# Altium PCB BLE_TORQUE.PcbDoc
Units mm, origin at the board's own origin, x right, y up, seen from the top; angles counter-clockwise.
Board outline 29.97 x 29.97 mm, 2 copper layers (Top Layer, Bottom Layer); 16 components, 16 nets, 110 pads, 17 vias.
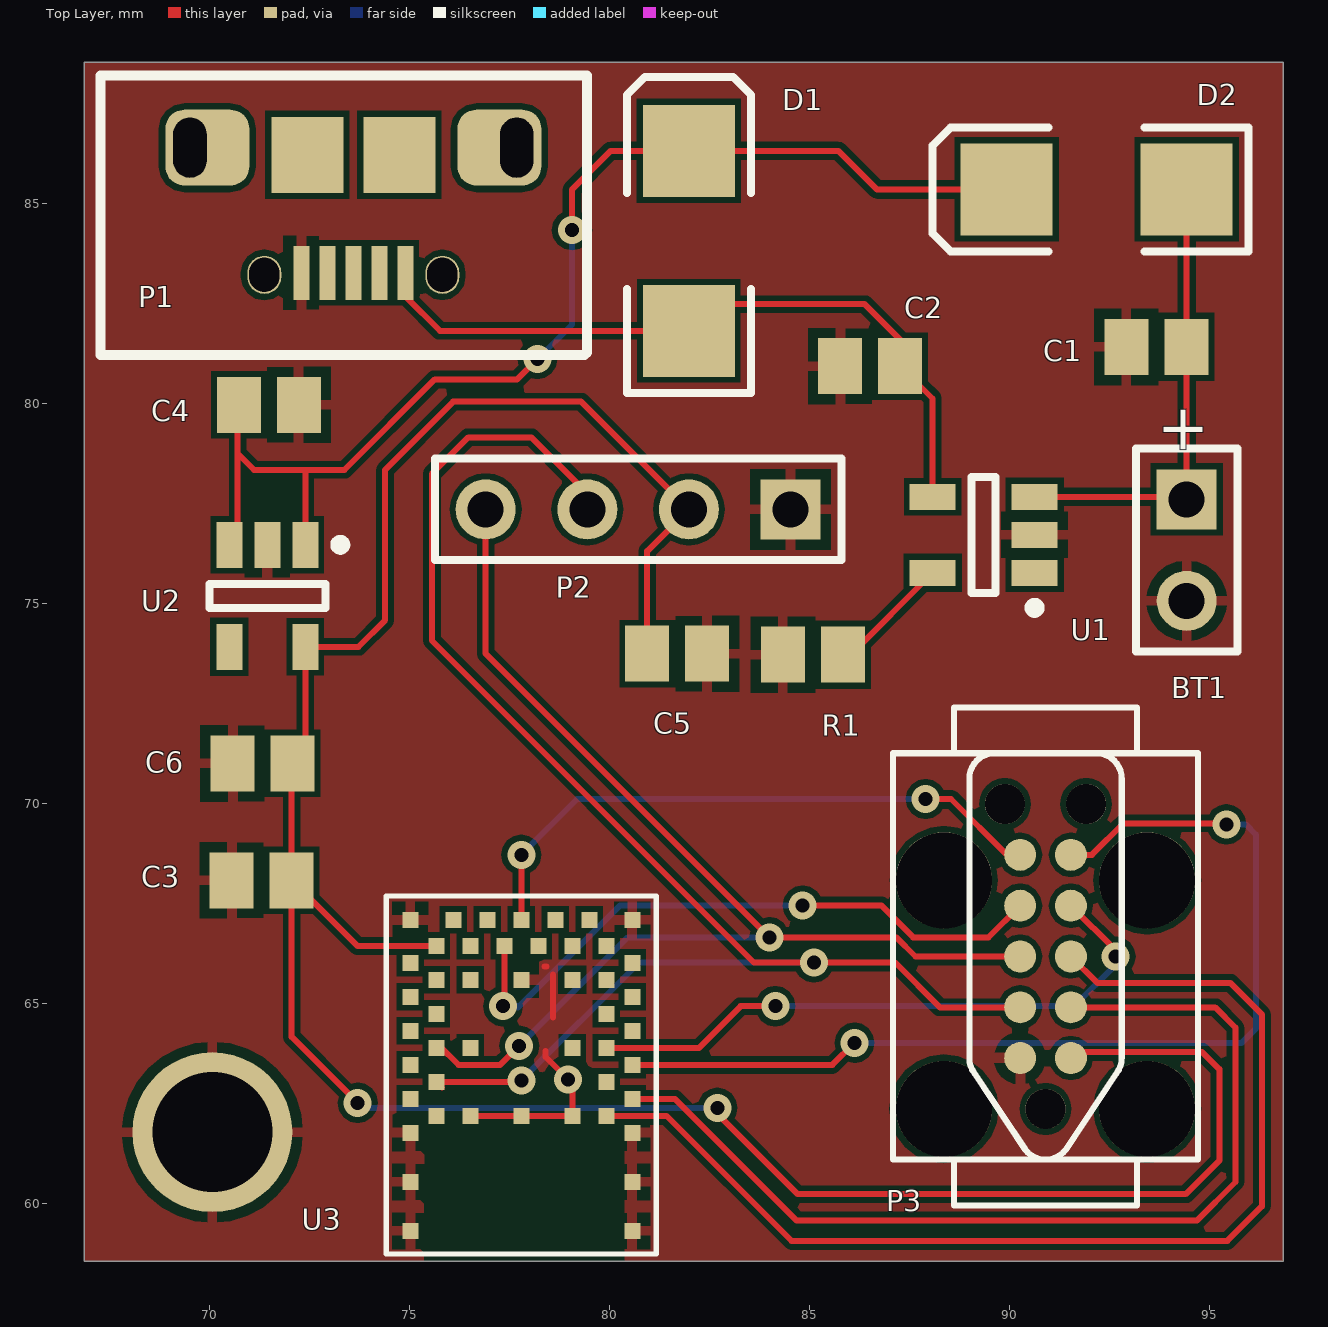
[diagram p0: Top Layer view]
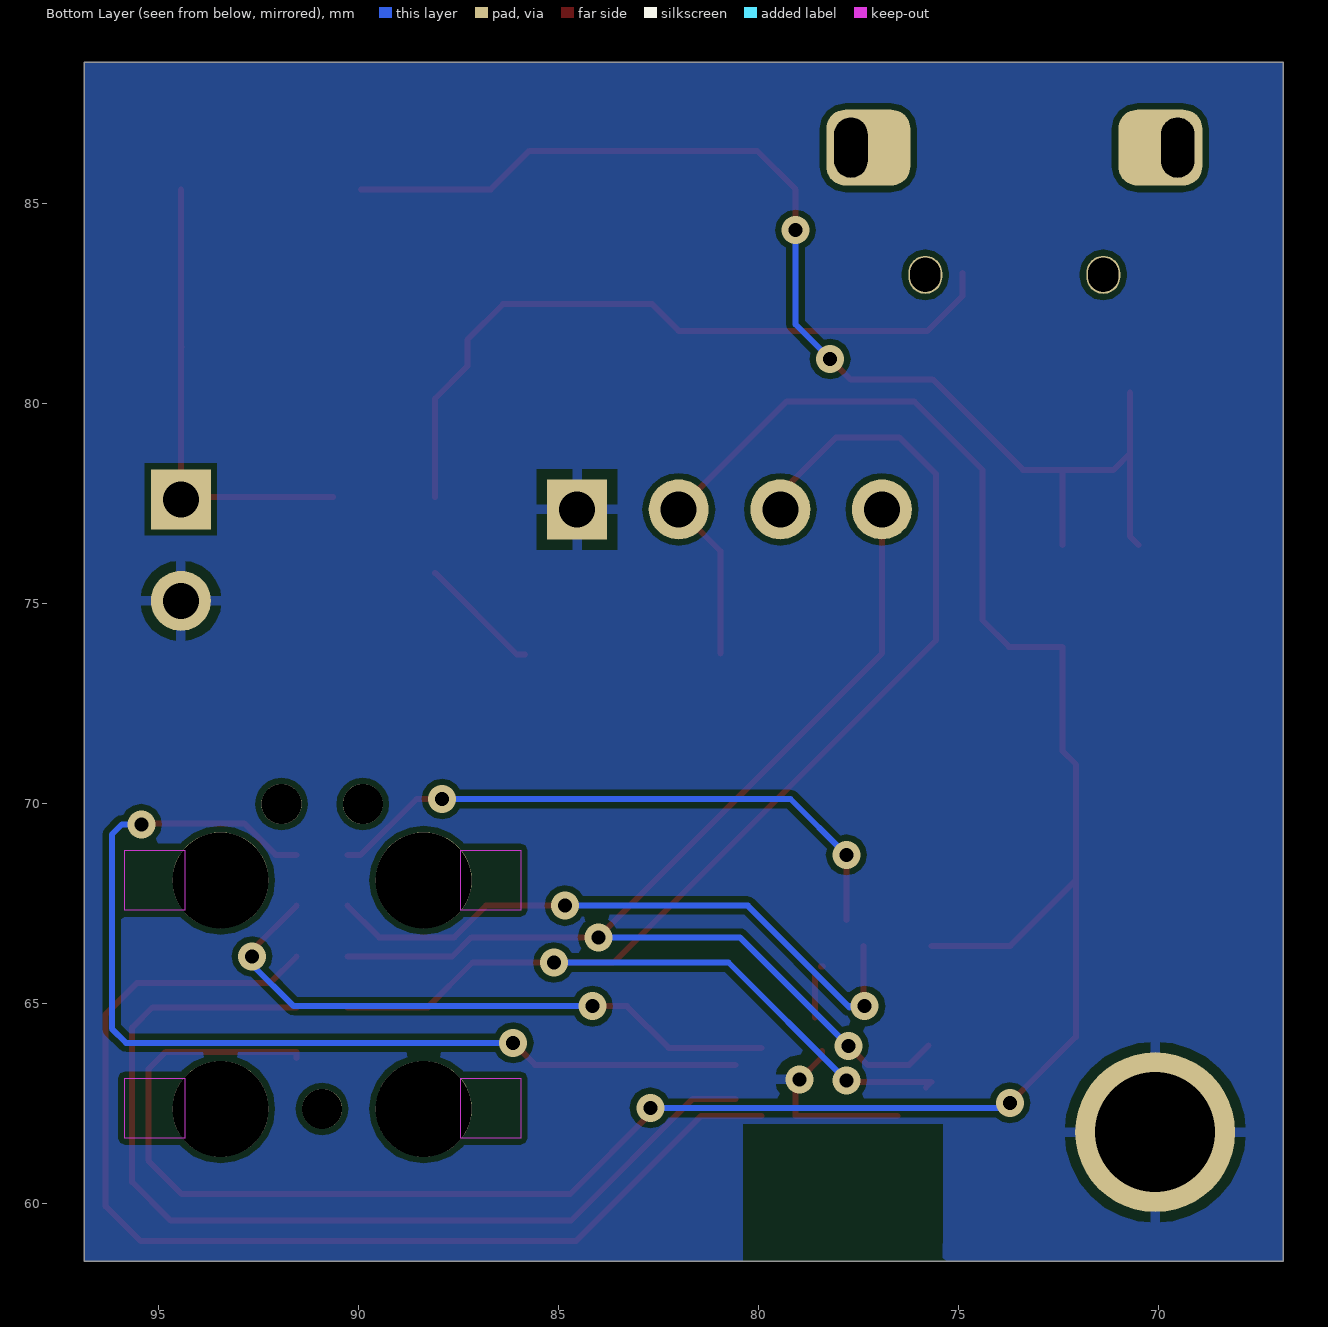
[diagram p1: Bottom Layer view, seen from below]

## Layer stack, top to bottom
Top Solder: solder mask 0.0102, Solder Resist, Dk 3.5
Top Layer: signal copper 0.0356
Dielectric 1: dielectric 0.32, FR-4, Dk 4.8
Bottom Layer: signal copper 0.0356
Bottom Solder: solder mask 0.0102, Solder Resist, Dk 3.5

## Board outline
66.878,58.547 96.85,58.547 96.85,88.519 66.878,88.519

## Design rules (kind name [scope] priority, off if disabled: settings)
Clearance [All] p1: gap=0.15 ignorepadtopadclearanceinfootprint=FALSE
DiffPairsRouting [All] p1: maxlimit=0.254 minlimit=0.15 mostfreqgap=0.15 toplayer_minwidth=0.15 toplayer_maxwidth=0.15 toplayer_prefwidth=0.15 bottomlayer_minwidth=0.15 bottomlayer_maxwidth=0.15 bottomlayer_prefwidth=0.15 maxuncoupledlength=12.7
HoleSize [All] p1: absolutevalues=TRUE maxlimit=2.54 minlimit=0.35 maxpercent=80.000 minpercent=20.000
HoleToHoleClearance [All] p1: gap=0.15 allowstackedmicrovias=TRUE
MinimumSolderMaskSliver [All] p1: minsoldermaskwidth=0.15
PolygonConnect [All] p1: connectstyle=Relief reliefconductorwidth=0.254 reliefentries=4 polygonreliefangle="90 Angle" airgapwidth=0.254
RoutingVias [All] p1: holewidth=0.35 width=0.7 viastyle="Through Hole" minholewidth=0.35 minwidth=0.7 maxholewidth=0.35 maxwidth=0.7
SilkToSilkClearance [All] p1: silktosilkclearance=0.15
SilkToSolderMaskClearance [IsPad] p1: minsilkscreentomaskgap=0.15 clearancetoexposedcopper=FALSE
SolderMaskExpansion [All] p1: expansion=0.102
Width [All] p1: maxlimit=0.15 minlimit=0.15 preferedwidth=0.15
24 further rules are at their usual default settings.

## Components (designator, comment, footprint, x,y, rotation, side; value= is the part's Value field where it differs from the comment)
BT1 "Battery" BAT-2 94.437,76.327 r270 top
C1 "Cap" C0805 93.675,81.407 r180 top value=4.7uF
C2 "Cap" C0805 86.524,80.924 r180 top value=4.7uF
C3 "Cap Pol3" C0805 71.311,68.072 r180 top value=10uF
C4 "Cap Pol3" C0805 71.488,79.959 r0 top value=10uF
C5 "Cap" C0805 81.698,73.736 r0 top value=0.1uF
C6 "Cap" C0805 71.335,70.993 r180 top value=4.7uF
D1 "Diode" SMB 81.991,84.059 r90 top
D2 "Diode" SMB 92.187,85.344 r180 top
P1 "MICRO_USB_AB" MICRO_USB_AB 75.827,83.208 r270 top
P2 "E2NS" HDR1X4 84.531,77.343 r180 top
P3 "TC2050-IDC" TC2050-IDC 91.542,63.627 r90 top
R1 "Res1" C0805 85.09,73.711 r180 top value=2K
U1 "MCP73831" SOT-23-5 89.357,76.708 r180 top
U2 "MIC5219" SOT-23-5 71.45,75.184 r270 top
U3 "BMD-350-A" BMD-350 77.8,63.881 r180 top

## Footprints (in the part's own frame and the unit in brackets; to place one, negate y for a bottom-side part, rotate by r counter-clockwise, add the part's x,y. Pads: shape width x height; smd on the part's side, far side on the other; paste and mask are expansions set on the pad)
BAT-2 [mm] "Battery; 2 Leads"
  rect 1.5x1.5 hole 0.9: 1(-1.27,0)
  round 1.5 hole 0.9: 2(1.27,0)
  silkscreen extent -2.54,-1.27 2.54,1.27
BMD-350 [mm] "BMD-350, LGA, 47pin ,0.8mm Pitch, 8.65mm x 6.4mm"
  rect 0.4x0.4 smd: 1(-2.775,4.575) 2(-2.775,3.35) 3(-2.775,2.125) 4(-2.125,1.7) 5(-2.775,1.275) 6(-2.125,0.85) 7(-2.775,0.425) 8(-2.125,0) 9(-2.775,-0.425) 10(-2.125,-0.85) 11(-2.775,-1.275) 12(-2.125,-1.7) 13(-2.775,-2.125) 14(-2.125,-2.55) 15(-2.775,-3.2) 16(-1.7,-3.2) 17(-1.275,-2.55) 18(-0.85,-3.2) 19(-0.425,-2.55) 20(0,-3.2) 21(0.425,-2.55) 22(0.85,-3.2) 23(1.275,-2.55) 24(1.7,-3.2) 25(2.125,-2.55) 26(2.775,-3.2) 27(2.775,-2.125) 28(2.125,-1.7) 29(2.775,-1.275) 30(2.125,-0.85) 31(2.775,-0.425) 32(2.125,0) 33(2.775,0.425) 34(2.125,0.85) 35(2.775,1.275) 36(2.125,1.7) 37(2.775,2.125) 38(2.775,3.35) 39(2.775,4.575) 40(-1.275,1.7) 41(-1.275,0) 42(-1.275,-1.7) 43(0,-1.7) 44(1.275,-1.7) 45(1.275,0) 46(1.275,1.7) 47(0,1.7)
  Multi-Layer pour cut-out: -2.575,4.9 -2.575,1.9 2.425,1.9 2.425,4.9
  silkscreen extent -3.37,-3.8 3.37,5.15, body extent -3.2,-3.62 3.2,5.03, height 1.47
C0805 [mm] "Chip Capacitor, Body 2.0x1.3mm, IPC High Density"
  rect 1.1x1.4 smd: 1(-0.75,0) 2(0.75,0)
  body extent -1.1,-0.72 1.1,0.72, height 1.4
HDR1X4 [mm] "Connector; Header; 4 Position"
  rect 1.5x1.5 hole 0.9: 1(0,0)
  round 1.5 hole 0.9: 2(2.54,0) 3(5.08,0) 4(7.62,0)
  silkscreen extent -1.27,-1.27 8.89,1.27
MICRO_USB_AB [mm] "Molex, Micro USB type AB 47589-0001"
  rect 1.35x0.4 smd: 1(-0.05,-0.925) 2(-0.05,-1.575) 3(-0.05,-2.225) 4(-0.05,-2.875) 5(-0.05,-3.525)
  rrect50% 1.9x2.1 hole 0.83 slot 1.5 at 0 deg unplated copper offset 0,-0.435: ""(-3.18,1.86)
  rrect50% 1.9x2.1 hole 0.83 slot 1.5 at 0 deg unplated copper offset 0,0.435: ""(-3.18,-6.31)
  rect 1.9x1.8 smd: ""(-3,-1.075) ""(-3,-3.375)
  oval 0.95x0.85 hole 0.75 slot 0.85 at 0 deg unplated: ""(0,0) ""(0,-4.45)
  silkscreen extent -4.98,-8.55 2.01,3.62
SMB [mm] "DO-214-AA/SMB; 2 C-Bend Leads; Body 5.3 x 3.6 mm, inc. leads (LxW)"
  rect 2.3x2.3 smd: 1(-2.25,0) 2(2.25,0)
  silkscreen extent -3.8,-1.55 4.1,1.55
SOT-23-5 [mm] "SOT23, 5-Leads, Body 2,9x2,8mm (max), Pitch 0,95mm, IPC Medium Density"
  rect 1.15x0.65 smd: 1(-1.275,0.95) 2(-1.275,0) 3(-1.275,-0.95) 4(1.275,-0.95) 5(1.275,0.95)
  silkscreen extent -1.4,-1.45 0.3,1.95, body extent -1.48,-1.55 1.52,1.55, height 1.35
TC2050-IDC [mm]
  round 0.8 smd paste-0.9: 1(0,0) 2(1.27,0) 3(2.54,0) 4(3.81,0) 5(5.08,0) 6(5.08,1.27) 7(3.81,1.27) 8(2.54,1.27) 9(1.27,1.27) 10(0,1.27)
  round 1 hole 1 paste-1.1: A(-1.27,0.635) B(6.35,-0.381) C(6.35,1.651)
  round 2.4 hole 2.4 paste-2.5: D(-1.27,-1.905) E(4.445,-1.905) F(4.445,3.175) G(-1.27,3.175)
  Bottom Layer keep-out region: -2,-4.3 -0.5,-4.3 -0.5,-2.8 -2,-2.8
  Bottom Layer keep-out region: 3.7,-4.3 5.2,-4.3 5.2,-2.8 3.7,-2.8
  Bottom Layer keep-out region: -2,4.1 -0.5,4.1 -0.5,5.6 -2,5.6
  Bottom Layer keep-out region: 3.7,4.1 5.2,4.1 5.2,5.6 3.7,5.6
  silkscreen extent -3.68,-3.17 8.76,4.45

## Part data
BT1: "Multicell Battery", LatestRevisionDate=17-Jul-2002, LatestRevisionNote="Re-released for DXP Platform.", PackageDescription="Battery; 2 Leads", PackageReference=BAT-2, Published=24-Mar-1999, Publisher="Altium Limited"
C1 C2 C5 C6: "Capacitor", LatestRevisionDate=17-Jul-2002, LatestRevisionNote="Re-released for DXP Platform.", PackageDescription="Radial Cap, Thru-Hole; 2 Leads; 0.3 in Pin Spacing", PackageReference=RAD-0.3, Published=8-Jun-2000, Publisher="Altium Limited"
C3 C4: "Polarized Capacitor (Surface Mount)", LatestRevisionDate=29-May-2009, LatestRevisionNote="IPC-7351 Footprint Added.", PackageDescription="Chip Capacitor", PackageReference=C0805, Published=8-Jun-2000, Publisher="Altium Limited"
D1 D2: "Default Diode", Code_JEDEC=DO-214-AB, LatestRevisionDate=17-Jul-2002, LatestRevisionNote="Re-released for DXP Platform.", PackageDescription="DO-214-AB/SMC; 2 C-Bend Leads; Body 7.9 x 5.9 mm, inc. leads (LxW)", PackageReference=SMC, PackageVersion=Sep-1996, Published=8-Jun-2000, Publisher="Altium Limited"
P2: library part "Header 4", "Header, 4-Pin", LatestRevisionDate=17-Jul-2002, LatestRevisionNote="Re-released for DXP Platform.", Publisher="Altium Limited"
R1: "Resistor", LatestRevisionDate=17-Jul-2002, LatestRevisionNote="Re-released for DXP Platform.", PackageDescription="Axial Device, Thru-Hole; 2 Leads; 0.3 in Pin Spacing", PackageReference=AXIAL-0.3, Published=8-Jun-2000, Publisher="Altium Limited"
U3: library part BMD-350, "Bluetooth 4.2 LE Module, nRF52832, 512kB Flash, 64kB RAM", Manufacturer=Rigado, Manufacturer P/N=BMD-350-A-R, RF Freq=2.4GHz, Added By="Cam N", Added Date=8/9/2016, Height=1.5mm, Internal Antenna="Ceramic Chip", Part Number=BMD-350-A, Protocol="BLE 4.2", Size="8.65mm x 6.4mm"

## Free pads (board coordinates)
  round 4 hole 3: 3(70.079,61.773)

## Via types
v1: diameter 0.7, hole 0.35, Top Layer to Bottom Layer, tented both sides, 17 vias

## Nets (pads, with @x,y where several pads share a name; then routed paths per layer and width w, separated by ;. In a path a pad name is that pad's centre, name@x,y a point inside that pad or via, vN(x,y) a via of type N, cw(c..) or ccw(c..) an arc to the next point about the centre after c; other vN are vias at no path point)
DM_USB: P1.2
DP_USB: P1.3
GND: BT1.2 C1.2 C2.2 C3.2 C4.2 C5.2 C6.2 P1.5 P2.1 P3.10 pad.3 R1.2 U1.2 U2.2 U3.1 U3.2 U3.3 U3.15 U3.26 U3.37 U3.38 U3.39 U3.40 U3.43 U3.46 U3.47 | length 5.6
  Top Layer w0.15: U3.46 U3.47 U3.40 79.075,62.987 v1(78.969,63.094) 78.41,63.652 78.41,63.805 ; 78.384,65.913 78.435,65.913 ; 78.588,64.643 78.588,65.71
NetC4_1: C4.1 D1.2 D2.2 U2.1 U2.3 | length 30.8
  Top Layer w0.15: U2.3 70.712,76.671 70.712,78.741 ; C4.1@70.712,80.264 70.712,78.741 ; U2.1 72.4,78.323 72.39,78.334 ; v1(78.207,81.102) 77.699,80.594 75.641,80.594 73.381,78.334 72.39,78.334 ; v1(79.07,84.328) 79.07,85.344 80.035,86.309 D1.2 85.725,86.309 86.69,85.344 D2.2 ; 70.712,78.741 71.12,78.334 72.39,78.334
  Bottom Layer w0.15: v1(78.207,81.102) 79.07,81.966 v1(79.07,84.328)
NetR1_1: R1.1 U1.5 | length 3.1
  Top Layer w0.15: R1.1 86.035,73.711 U1.5
RESET: P3.5 U3.7 | length 25.9
  Top Layer w0.15: U3.7 85.579,63.456 v1(86.131,64.008) ; P3.5 92.066,68.707 92.856,69.497 95.4,69.497 v1(95.428,69.469)
  Bottom Layer w0.15: v1(86.131,64.008) 95.809,64.008 96.164,64.364 96.164,69.215 95.91,69.469 v1(95.428,69.469)
RxD: P3.7 U3.21 | length 16.2
  Top Layer w0.15: v1@77.318,64.922 v1(77.343,64.922) 77.375,64.955 U3.21 ; v1(84.836,67.437) 86.81,67.437 87.6,66.647 89.482,66.647 P3.7
  Bottom Layer w0.15: v1(77.343,64.922) 77.699,64.922 77.724,64.897 80.264,67.437 v1(84.836,67.437)
SCL: P2.4 P3.8 U3.32 | length 29.9
  Top Layer w0.15: U3.32@75.741,63.947 76.232,63.456 77.274,63.456 v1(77.749,63.932) ; P2.4 76.911,73.736 v1(84,66.647) 87.175,66.647 87.655,66.167 P3.8
  Bottom Layer w0.15: v1(77.749,63.932) 80.465,66.647 v1(84,66.647)
SDA: P2.3 P3.9 U3.34 | length 38.8
  Top Layer w0.15: U3.34@75.816,62.89 U3.34 77.763,63.031 v1(77.8,63.068) ; P2.3 79.451,77.749 78.054,79.146 76.479,79.146 75.565,78.232 75.565,74.066 83.617,66.015 v1(85.115,66.015) 87.147,66.015 88.265,64.897 P3.9
  Bottom Layer w0.15: v1(77.8,63.068) 80.747,66.015 v1(85.115,66.015)
SWDCLK: P3.3 U3.4 | length 28.2
  Top Layer w0.15: U3.4 81.431,62.181 84.557,59.055 95.453,59.055 96.317,59.919 96.317,64.719 95.529,65.507 92.202,65.507 P3.3
SWDIO: P3.2 U3.5 | length 24.9
  Top Layer w0.15: U3.5 81.641,62.606 84.684,59.563 94.691,59.563 95.656,60.528 95.656,64.389 95.148,64.897 P3.2
SWO: P3.4 U3.8 | length 15.5
  Top Layer w0.15: U3.8 82.245,63.881 83.287,64.922 v1(84.15,64.922) ; P3.4 92.659,66.319 v1(92.659,66.167)
  Bottom Layer w0.15: v1(84.15,64.922) 91.618,64.922 92.659,65.964 v1(92.659,66.167)
TxD: P3.6 U3.20 | length 15.3
  Top Layer w0.15: U3.20 v1(77.8,68.707) ; v1(87.909,70.104) 88.544,70.104 89.941,68.707 90.135,68.707 P3.6
  Bottom Layer w0.15: v1(77.8,68.707) 79.197,70.104 v1(87.909,70.104)
VBAT: BT1.1 C1.1 D2.1 U1.3 | length 11.6
  Top Layer w0.15: U1.3 94.376,77.658 BT1.1 94.437,81.395 C1.1 94.437,81.419 D2.1
VCC: C3.1 C5.1 C6.1 P2.2 P3.1 U2.5 U3.25 | length 65.3
  Top Layer w0.15: v1(73.711,62.509) 72.061,64.159 C3.1 ; U3.25 73.702,66.431 C3.1 ; C5.1 80.948,76.3 P2.2 79.299,80.035 76.098,80.035 74.397,78.334 74.397,74.574 73.731,73.909 U2.5 72.4,71.308 C6.1 72.061,70.969 C3.1 ; v1(82.702,62.382) 82.626,62.306 84.709,60.223 94.412,60.223 95.25,61.062 95.25,63.348 94.816,63.782 91.542,63.782 P3.1
  Bottom Layer w0.15: v1(73.711,62.509) 73.838,62.382 v1(82.702,62.382)
VCC_USB: C2.1 D1.1 P1.1 U1.4 | length 18.2
  Top Layer w0.15: P1.1 74.902,82.675 75.768,81.809 D1.1 82.656,82.474 86.385,82.474 87.274,81.585 C2.1 88.082,80.117 U1.4
pads on no net: P1. P1.4 P3.A P3.B P3.C P3.D P3.E P3.F P3.G U1.1 U2.4 U3.6 U3.9 U3.10 U3.11 U3.12 U3.13 U3.14 U3.16 U3.17 U3.18 U3.19 U3.22 U3.23 U3.24 U3.27 U3.28 U3.29 U3.30 U3.31 U3.33 U3.35 U3.36 U3.41 U3.42 U3.44 U3.45

## Polygon pours and split planes (outlines as drawn)
GND on Bottom Layer "Bottom Layer-GND" (solid, pour order 6): 66.878,88.519 96.85,88.519 96.85,58.547 66.878,58.547
GND on Top Layer "Top Layer-GND" (solid, pour order 2): 66.878,88.519 96.825,88.519 96.85,88.494 96.85,58.547 66.878,58.547

## Other copper
Top Layer:
  pour cut-out: 75.375,61.981 80.375,61.981 80.391,61.965 80.391,58.42 75.438,58.42 75.362,58.496
  pour cut-out: 75.362,58.547 75.375,58.56 75.375,61.981 80.375,61.981 80.391,61.965 80.391,58.547
Bottom Layer:
  pour cut-out: 75.375,61.981 80.375,61.981 80.391,61.965 80.391,58.522 75.413,58.522 75.387,58.496

## Silkscreen, mask and mechanical layers (free items; w line width, h text height)
Mechanical 1:
  the board outline again, w0.1

## Text inside footprints (layer, text, board x,y; h text height)
BT1: Top Overlay "+" at 93.86,79.997 h1.15 r270